# Altium PCB SolarCharger.PcbDoc
Units mm, origin at the board's own origin, x right, y up, seen from the top; angles counter-clockwise.
Board outline 50.8 x 50.8 mm, 2 copper layers (Top Layer, Bottom Layer), stack 0.471 mm thick; 40 components, 21 nets, 95 pads, 189 vias.
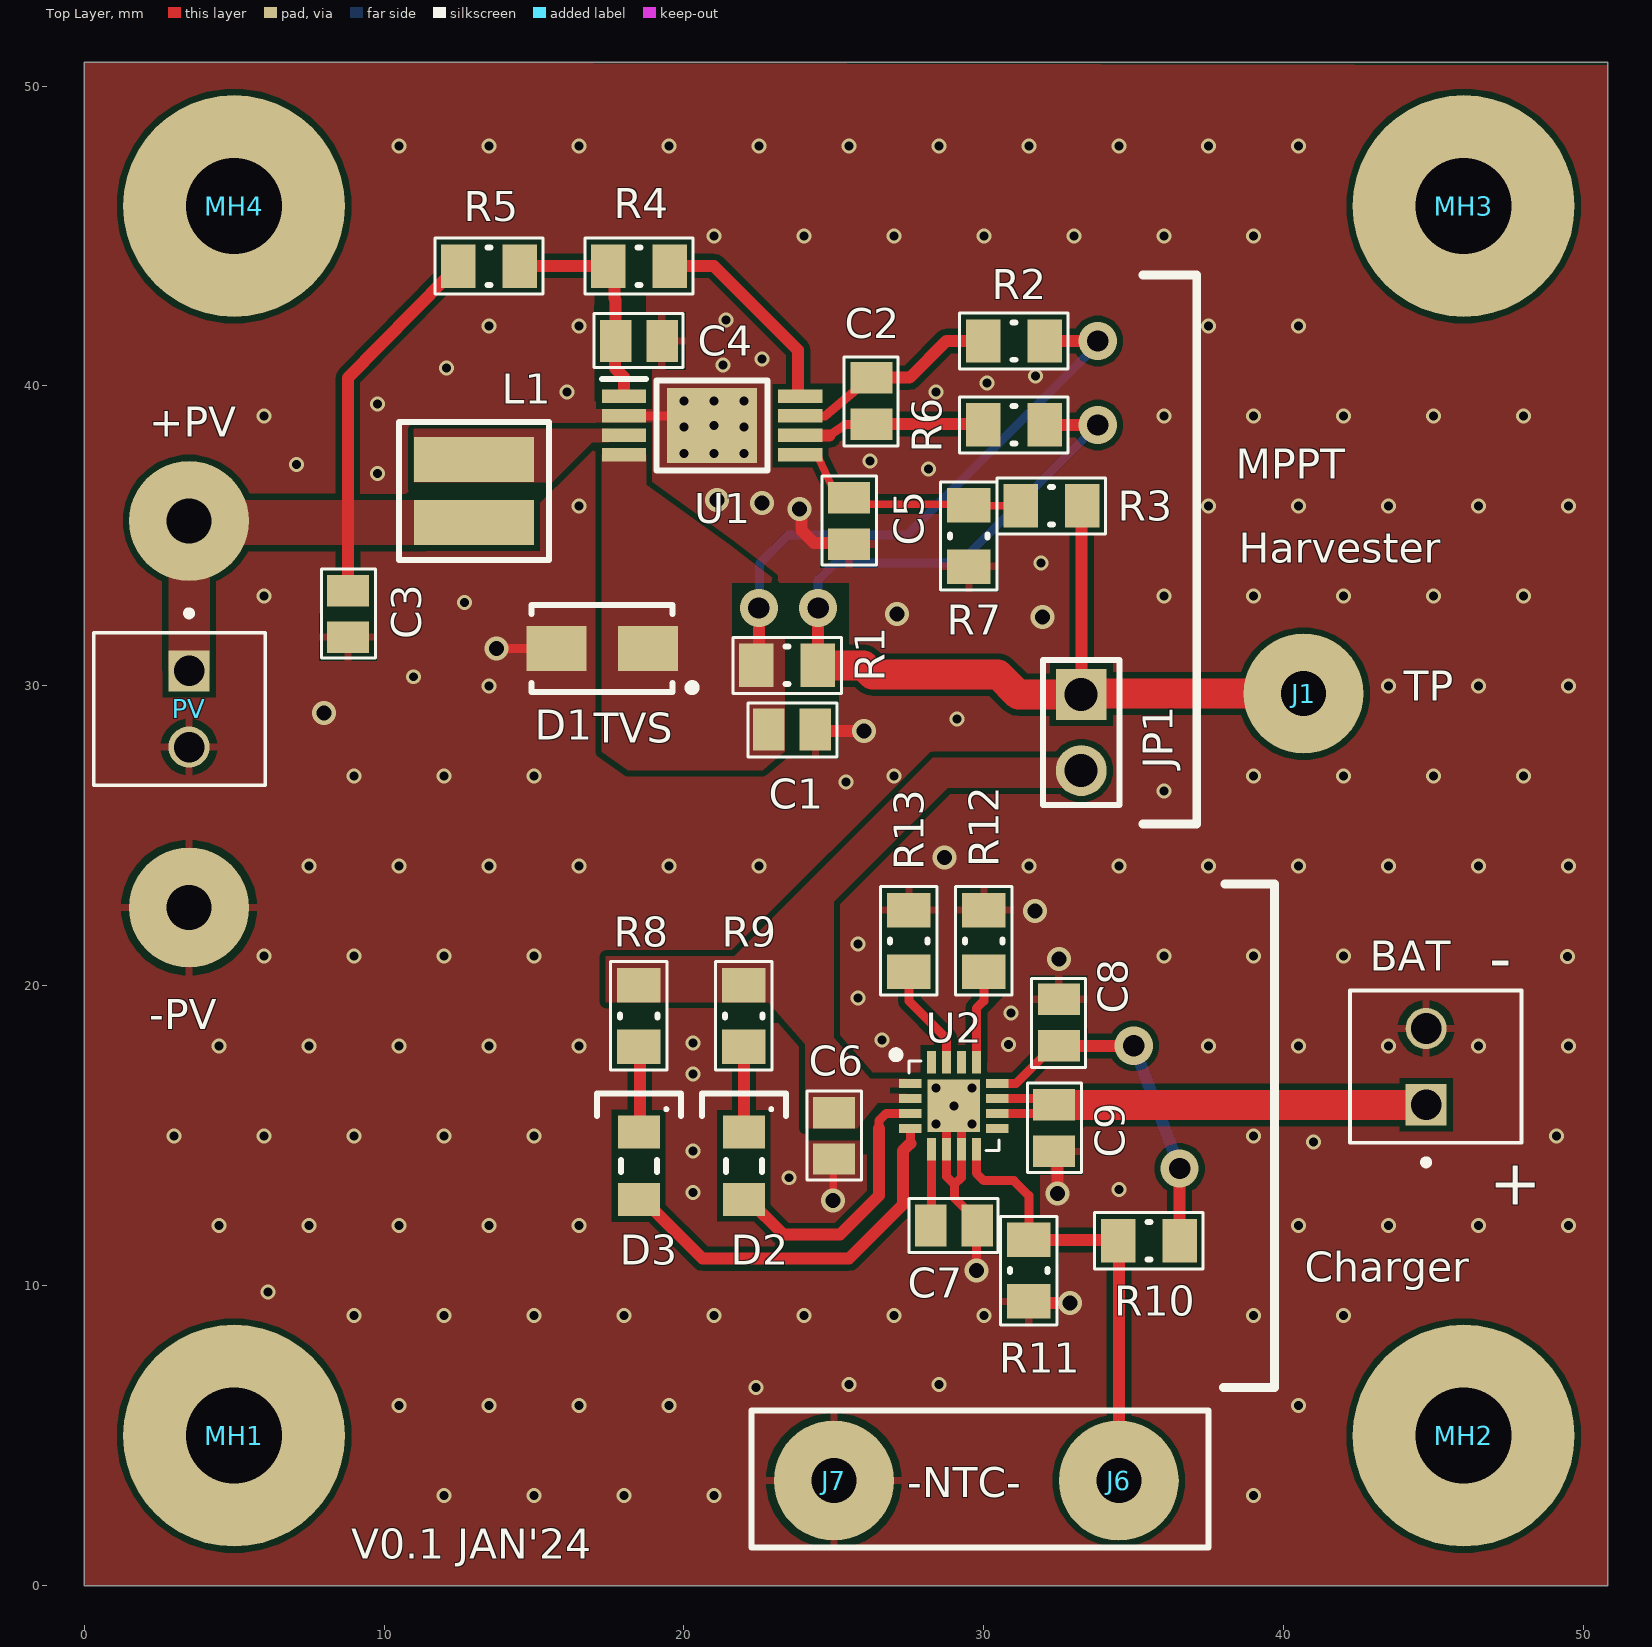
[diagram p0: Top Layer view]
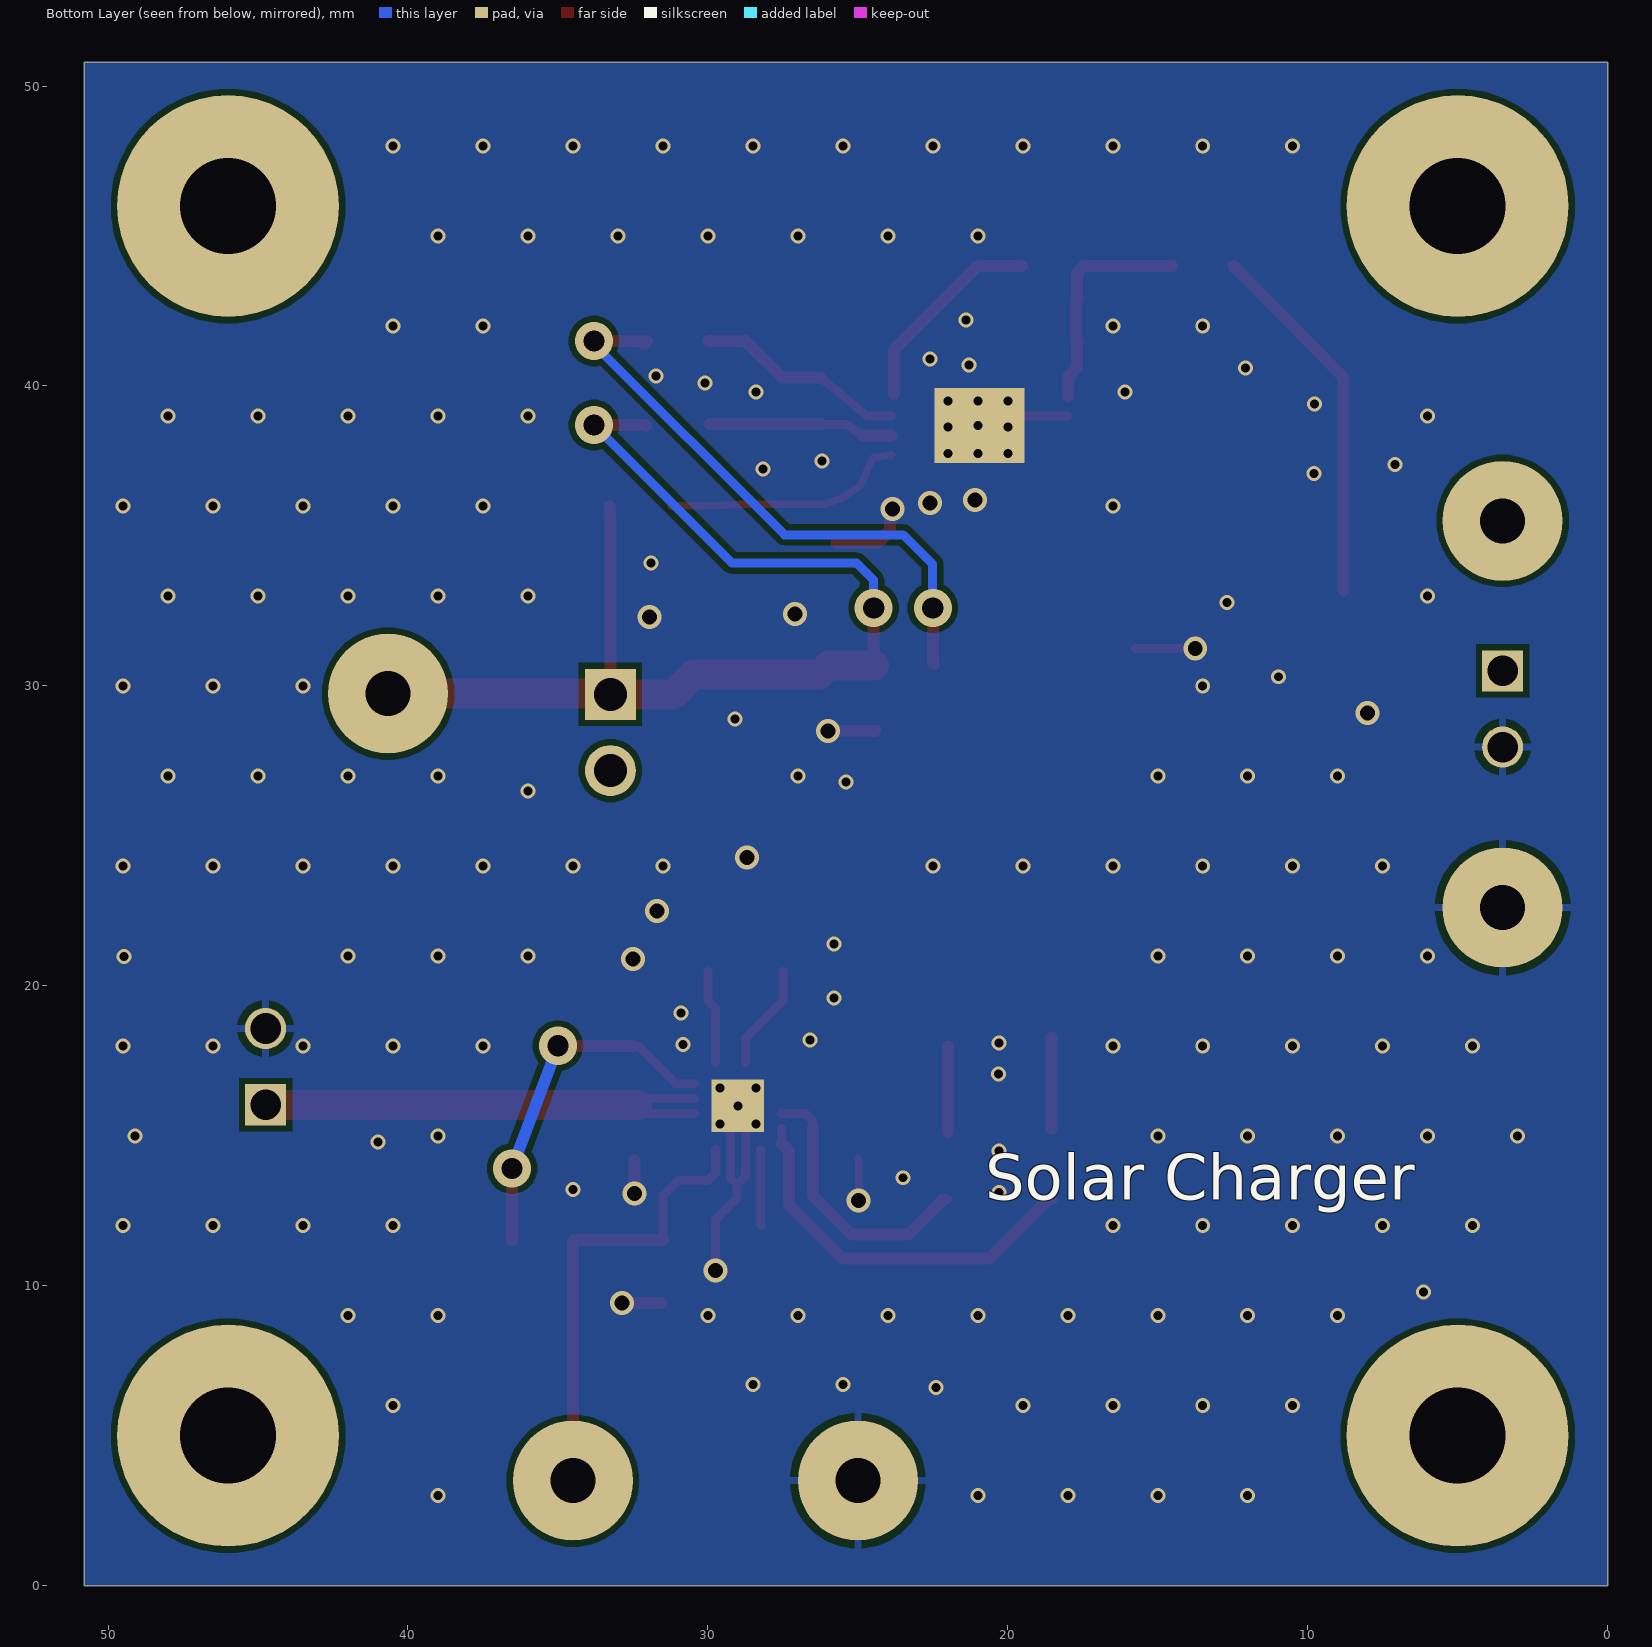
[diagram p1: Bottom Layer view, seen from below]
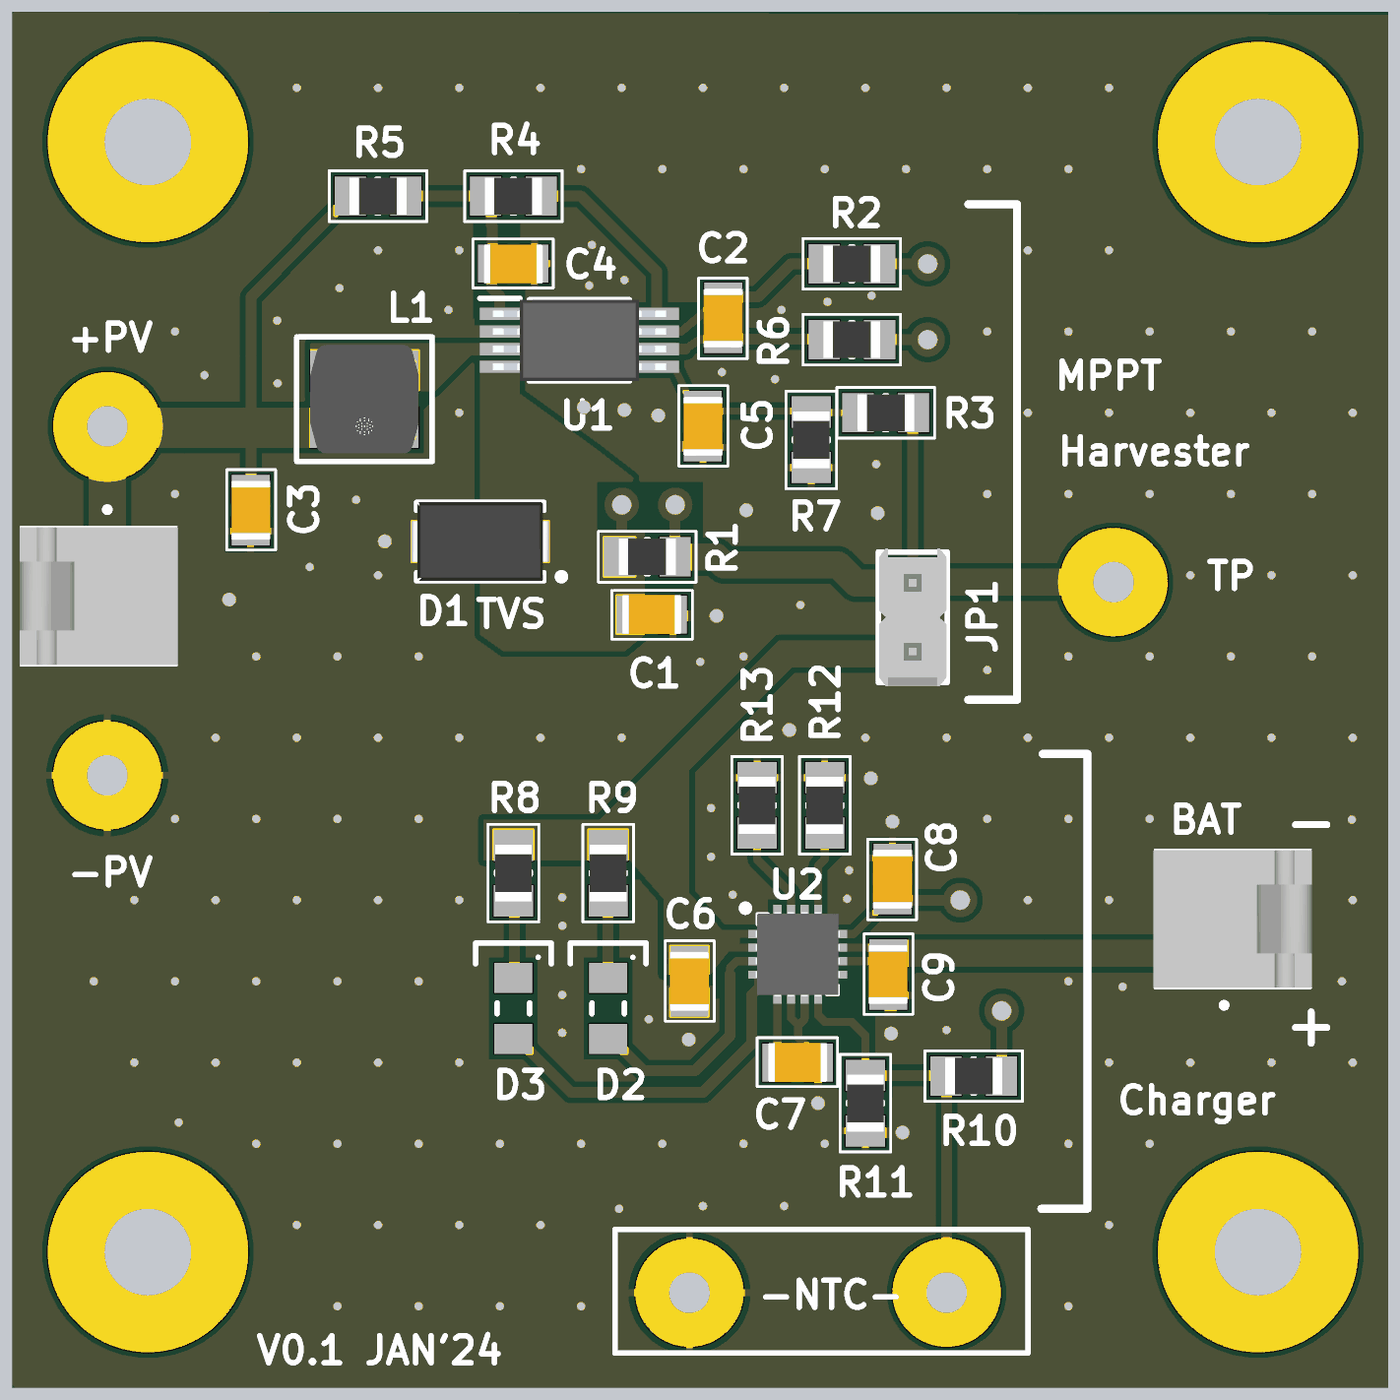
[diagram p2: 3D render of the assembled board from above, using the file's embedded part models]

## Layer stack, top to bottom
Top Solder: solder mask 0.0102, Solder Resist, Dk 3.5
Top Layer: signal copper 0.0356
Dielectric 1: dielectric 0.4, FR-4, Dk 4.8
Bottom Layer: signal copper 0.0356
Bottom Solder: solder mask 0.0102, Solder Resist, Dk 3.5

## Board outline
0,0 50.8,0 50.8,50.8 0,50.8

## Design rules (kind name [scope] priority, off if disabled: settings)
Clearance [All] p1: gap=0.2 ignorepadtopadclearanceinfootprint=FALSE
HoleSize [All] p1: absolutevalues=TRUE maxlimit=6 minlimit=0.2 maxpercent=80.000 minpercent=20.000
HoleToHoleClearance [All] p1: gap=0.5 allowstackedmicrovias=TRUE
MinimumSolderMaskSliver [All] p1: minsoldermaskwidth=0.06
PolygonConnect [All] p1: connectstyle=Relief reliefconductorwidth=0.254 reliefentries=4 polygonreliefangle="90 Angle" airgapwidth=0.254
RoutingVias [All] p1: holewidth=0.6 width=0.8 viastyle="Through Hole" minholewidth=0.3 minwidth=0.5 maxholewidth=2 maxwidth=5
SilkToSolderMaskClearance [IsPad] p1: minsilkscreentomaskgap=0.1 clearancetoexposedcopper=TRUE
SolderMaskExpansion [All] p1: expansion=0.05 istentingtop=FALSE
Width [All] p1: maxlimit=5 minlimit=0.2 preferedwidth=0.3 minimp=50.000000 maximp=50.000000 favimp=50.000000
26 further rules are at their usual default settings.

## Components (designator, comment, footprint, x,y, rotation, side; value= is the part's Value field where it differs from the comment)
+PV "Power Pad" PAD#1 3.5,35.5 r0 top
-PV "Power Pad" PAD#1 3.5,22.606 r0 top
BAT "640456-2" TE_640456-2 44.748,16.035 r270 top
C1 "10uF" YAGEO-0805-C-L 23.609,28.548 r180 top
C2 "1uF" YAGEO-0805-C-L 26.25,39.5 r90 top
C3 "47uF" YAGEO-0805-C-L 8.8,32.4 r270 top
C4 "1 nF" YAGEO-0805-C-L 18.5,41.5 r0 top
C5 "1 nF" YAGEO-0805-C-L 25.5,35.5 r270 top
C6 "47uF" YAGEO-0805-C-L 25,15 r270 top
C7 "10 nF" YAGEO-0805-C-L 29,12 r0 top
C8 "1 nF" YAGEO-0805-C-L 32.5,18.775 r90 top
C9 "4.7uF" YAGEO-0805-C-L 32.341,15.254 r270 top
D1 "TVS-MSKSEMI" MSKSEMI-TVS-L 17.273,31.242 r180 top
D2 "SMD LED" SMD-LED-L 22,14 r270 top
D3 "SMD LED" SMD-LED-L 18.5,14 r270 top
J1 "Power Pad" PAD#2 40.665,29.743 r0 top
J6 "Power Pad" PAD#2 34.5,3.5 r0 top
J7 "Power Pad" PAD#2 25,3.5 r0 top
JP1 "J2P" DIP2 33.249,29.718 r270 top
L1 "10uH" "BEAD 10UH" 13,36.5 r90 top
MH1 "Mounting Hole" "MOUNTING HOLE"#1 4.2,4 r0 top
MH2 "Mounting Hole" "MOUNTING HOLE"#2 46.75,4 r0 top
MH3 "Mounting Hole" "MOUNTING HOLE"#3 46.75,46.75 r0 top
MH4 "Mounting Hole" "MOUNTING HOLE"#4 4.2,46.8 r0 top
PV "640456-2" TE_640456-2 3.5,30.5 r90 top
R1 "0Ω" YAGEO-0805-R-L 23.444,30.681 r0 top
R2 "1KΩ" YAGEO-0805-R-L 31,41.5 r0 top
R3 "2.2MΩ" YAGEO-0805-R-L 32.25,36 r0 top
R4 "0Ω" YAGEO-0805-R-L 18.5,44 r0 top
R5 "1KΩ" YAGEO-0805-R-L 13.5,44 r180 top
R6 "1KΩ" YAGEO-0805-R-L 31,38.7 r0 top
R7 "820KΩ" YAGEO-0805-R-L 29.5,35 r90 top
R8 "1KΩ" YAGEO-0805-R-L 18.5,19 r90 top
R9 "1KΩ" YAGEO-0805-R-L 22,19 r90 top
R10 "1KΩ" YAGEO-0805-R-L 35.5,11.5 r0 top
R11 "470Ω" YAGEO-0805-R-L 31.5,10.5 r90 top
R12 "3.3KΩ" YAGEO-0805-R-L 30,21.5 r270 top
R13 "24KΩ" YAGEO-0805-R-L 27.5,21.5 r270 top
U1 "SPV1040T" SOP65P640X120-8N 20.938,38.675 r0 top
U2 "L6924D" QFN50P300X300X100-17L-D 29,16 r0 top

## Footprints (in the part's own frame and the unit in brackets; to place one, negate y for a bottom-side part, rotate by r counter-clockwise, add the part's x,y. Pads: shape width x height; smd on the part's side, far side on the other; paste and mask are expansions set on the pad)
"BEAD 10UH" [mm]
  rect 1.5x4 smd: 1(-1.05,0) 2(1.05,0)
  silkscreen extent -2.3,-2.5 2.3,2.5, body extent -2,-2 2,2, height 1.21
DIP2 [mm]
  rect 1.7x1.7 hole 1.1: 1(0,0)
  round 1.7 hole 1.1: 2(2.54,0)
  silkscreen extent -1.14,-1.27 3.68,1.27, body extent -1.27,-1.24 3.81,1.24, height 8.39
"MOUNTING HOLE"#1 [mm]
  round 7.4 hole 3.2: 1(0.8,1)
"MOUNTING HOLE"#2 [mm]
  round 7.4 hole 3.2: 1(-0.75,1)
"MOUNTING HOLE"#3 [mm]
  round 7.4 hole 3.2: 1(-0.75,-0.75)
"MOUNTING HOLE"#4 [mm]
  round 7.4 hole 3.2: 1(0.8,-0.8)
MSKSEMI-TVS-L [mm] "MSKSEMI TVS Large footprint"
  rect 2x1.5 smd: 1(-1.525,0) 2(1.525,0)
  silkscreen extent -3.13,-1.45 2.35,1.45, body extent -2.55,-1.45 2.55,1.45, height 2.41
PAD#1 [mm]
  round 4 hole 1.5: ""(0,0)
PAD#2 [mm]
  round 4 hole 1.5: 1(0,0)
QFN50P300X300X100-17L-D [mm]
  rect 0.75x0.3 smd mask+0: 1(-1.45,0.75) 2(-1.45,0.25) 3(-1.45,-0.25) 4(-1.45,-0.75) 9(1.45,-0.75) 10(1.45,-0.25) 11(1.45,0.25) 12(1.45,0.75)
  rect 0.3x0.75 smd mask+0: 5(-0.75,-1.45) 6(-0.25,-1.45) 7(0.25,-1.45) 8(0.75,-1.45) 13(0.75,1.45) 14(0.25,1.45) 15(-0.25,1.45) 16(-0.75,1.45)
  rect 1.75x1.75 smd: 17(0,0)
  rect 1.75x1.75 smd far side: 17(0,0)
  silkscreen extent -2.05,-1.5 1.5,1.83, body extent -1.55,-1.55 1.55,1.55, height 1
SMD-LED-L [mm] "SMD LED Low Density"
  rect 1.1x1.4 smd: 1(-1.125,0) 2(1.125,0)
  silkscreen extent -2.41,-1.4 0.2,1.4, body extent -1.1,-0.63 1.1,0.63, height 0.9
SOP65P640X120-8N [mm]
  rect 1.475x0.45 smd mask+0: 1(-2.938,0.975) 2(-2.938,0.325) 3(-2.938,-0.325) 4(-2.938,-0.975) 5(2.938,-0.975) 6(2.938,-0.325) 7(2.938,0.325) 8(2.938,0.975)
  rect 3x2.5 smd mask+0: 9(0,0)
  rect 3x2.5 smd far side mask+0: 9(0,0)
  silkscreen extent -3.67,-1.5 1.85,1.55, body extent -3.2,-1.5 3.2,1.5, height 1.2
TE_640456-2 [mm]
  rect 1.37x1.37 hole 1.02: 1(0,0)
  round 1.37 hole 1.02: 2(-2.54,0)
  silkscreen extent -3.81,-2.54 2.02,3.18, body extent -3.81,-2.6 1.27,3.24, height 9.41
YAGEO-0805-C-L [mm] "Yageo Large Footprint"
  rect 1.05x1.4 smd: 1(-0.775,0) 2(0.775,0)
  silkscreen extent -1.5,-0.89 1.47,0.91, body extent -1.1,-0.72 1.1,0.72, height 1.45
YAGEO-0805-R-L [mm] "Yageo Resistor Large Footprint"
  rect 1.15x1.45 smd: 1(-1.025,0) 2(1.025,0)
  silkscreen extent -1.8,-0.94 1.8,0.94, body extent -1.05,-0.67 1.05,0.67, height 0.6

## Part data
+PV -PV J1 J6 J7: library part PAD, "Power pad 4mmx1.5mm"
BAT PV: "1x2P 1 2.54mm 2 Copper Alloy Plugin,P=2.54mm Wire To Board / Wire To Wire Connector", Manufacturer=TE, Supplier Part Number=C86502, ComponentLink1Description="TE Connector", ComponentLink1URL=https://datasheet.lcsc.com/lcsc/2304140030_TE-Connectivity-640456-2_C86502.pdf, Manufacturer Part Number=640456-2, Price=0.0711, Supplier=LCSC
C1: library part CC0805KKX5R7BB106, "10 uF, 16 V, ± 10%, X5R, 0805", Manufacturer=Yageo, Supplier Part Number=C89827, ComponentLink5Description="Yageo Capacitors", ComponentLink5URL=http://www.yageo.com/documents/recent/UPY-GPHC_X5R_4V-to-50V_12.pdf?src-supplier=Avnet, Form=0805, Manufacturer Part Number=CC0805KKX5R7BB106, Price=0.0419, Supplier=LCSC
C2: library part CC0805KKX7R6BB105, "1 uF, 10 V, ± 10%, X7R, 0805", Manufacturer=Yageo, Supplier Part Number=C519973, ComponentLink10Description="Yageo Capacitors", ComponentLink10URL=https://datasheet.lcsc.com/lcsc/2007101233_YAGEO-CC0805KKX7R6BB105_C519973.pdf, Form=0805, Manufacturer Part Number=CC0805KKX7R6BB105, Price=0.0116, Supplier=LSCS
C3 C6: library part CL21A476MQYNNNE, "47 uF, 6.3 V, ± 20%, X5R, 0805", Manufacturer=Samsung, Supplier Part Number=C16780, ComponentLink1Description="Samsung SMD Capacitor", ComponentLink1URL=https://datasheet.lcsc.com/lcsc/2304140030_Samsung-Electro-Mechanics-CL21A476MQYNNNE_C16780.pdf, Form=0805, Manufacturer Part Number=CL21A476MQYNNNE, Price=0.0273, Supplier=LCSC
C4 C5 C8: library part CC0805KRX7R9BB102, "1 nF,  50V, 10%, X7R, 0805", Manufacturer=Yageo, Supplier Part Number=C94121, ComponentLink6Description="Yageo Capacitors", ComponentLink6URL=https://datasheet.lcsc.com/lcsc/1810311439_YAGEO-CC0805KRX7R9BB102_C94121.pdf, Form=0805, Manufacturer Part Number=CC0805KRX7R9BB102, Price=0.0047, Supplier=LCSC
C7: library part CC0805KRX7R9BB103, "10 nF, 50 V, ± 10%, X7R, 0805", Manufacturer=Yageo, Supplier Part Number=C83170, ComponentLink5Description="Yageo Capacitors", ComponentLink5URL=https://datasheet.lcsc.com/lcsc/2304140030_YAGEO-CC0805KRX7R9BB103_C83170.pdf, Form=0805, Manufacturer Part Number=CC0805KRX7R9BB103, Price=0.0050, Supplier=LCSC
C9: library part CC0805KKX5R8BB475, "4.7 uF, 50 V, ± 10%, X5R, 0805", Manufacturer=Yageo, Supplier Part Number=C132173, ComponentLink1Description="Yageo Capacitors", ComponentLink1URL=https://datasheet.lcsc.com/lcsc/2304140030_YAGEO-CC0805KKX5R8BB475_C132173.pdf, Form=0805, Manufacturer Part Number=CC0805KKX5R8BB475, Price=0.0335, Supplier=LCSC
D1: library part SMAJ5.0A, "TVS 9.2V 6.4V 5V SMA", Manufacturer=MSKSEMI, Supplier Part Number=C5189780, ComponentLink1Description="MSKSEMI SMAJXXXA", ComponentLink1URL=https://datasheet.lcsc.com/lcsc/2309270936_MSKSEMI-SMAJ5-0A_C5189780.pdf, Manufacturer Part Number=SMAJ5.0A, Price=0.0220, Supplier=LCSC
D2 D3: "516nm~525nm -30℃~+85℃ Positive post Emerald 120° 80mW 0805", Manufacturer=XINGLIGHT, Manufacturer Part Number=XL-2012UGC, Supplier Part Number=C965815, ComponentLink1Description="XINGLIGHT SMD LED", ComponentLink1URL=https://datasheet.lcsc.com/lcsc/2211030000_XINGLIGHT-XL-2012UGC_C965815.pdf, Form=0805, Price=0.0049, Supplier=LCSC
JP1: library part PH-00218, "2.5mm 3A  2P Straight Square Pins 6mm -40℃~+105℃ 3mm 2.54mm Plugin Black 1x2P Plugin,P=2.54mm Pin Header", Manufacturer=Liasheng, Supplier Part Number=C2685144, ComponentLink1Description=https://datasheet.lcsc.com/lcsc/2106070303_Liansheng-PH-00218_C2685144.pdf, ComponentLink1URL=https://datasheet.lcsc.com/lcsc/2106070303_Liansheng-PH-00218_C2685144.pdf, Manufacturer Part Number=PH-00218, Price=0.0109, Supplier=LCSC
L1: library part VLS5045EX-100M, "10 uH Power Inductor 20% 100KHz Ferrite 2.5A 0.061Ohm", Manufacturer=TDK, Supplier Part Number=C404485, ComponentLink1Description="TDK Power Inductor", ComponentLink1URL=https://datasheet.lcsc.com/lcsc/2304140030_TDK-VLS5045EX-100M_C404485.pdf, Manufacturer Part Number=VLS5045EX-100M, Price=0.1245, Supplier=LCSC
MH1 MH2 MH3 MH4: "Mounting hole 7.4mm x 3.2mm"
R1 R4: library part AC0805FR-070RL, "0 Ohm, 1%, 0.125W, 0805", Manufacturer=Yageo, Supplier Part Number=C174076, ComponentLink1Description="Yageo Resistros", ComponentLink1URL=https://datasheet.lcsc.com/lcsc/2304140030_YAGEO-AC0805FR-070RL_C174076.pdf, Form=0805, Manufacturer Part Number=AC0805FR-070RL, Price=0.0039, Supplier=LCSC
R2 R5 R6 R8 R9 R10: library part RC0805FR-071KL, "1 kOhm, ± 1%, 125 mW, 0805", Manufacturer=Yageo, Supplier Part Number=C95781, ComponentLink1Description="Yageo Resistors", ComponentLink1URL=https://www.yageo.com/upload/media/product/productsearch/datasheet/rchip/PYu-RC_Group_51_RoHS_L_12.pdf, Form=0805, Manufacturer Part Number=RC0805FR-071KL, Price=0.0022, Supplier=LCSC
R3: library part RC0805FR-072M2L, "2.2 MOhm, ± 1%, 125 mW, 0805", Manufacturer=Yageo, Supplier Part Number=C137552, ComponentLink1Description="Yageo Resistors", ComponentLink1URL=https://datasheet.lcsc.com/lcsc/2304140030_YAGEO-RC0805FR-072M2L_C137552.pdf, Form=0805, Manufacturer Part Number=RC0805FR-072M2L, Price=0.0022, Supplier=LCSC
R7: library part RC0805FR-07820KL, "820 kOhm, ± 1%, 125 mW, 0805", Manufacturer=Yageo, Supplier Part Number=C141700, ComponentLink1Description="Yageo Resistors", ComponentLink1URL=https://datasheet.lcsc.com/lcsc/2304140030_YAGEO-RC0805FR-07820KL_C141700.pdf, Form=0805, Manufacturer Part Number=RC0805FR-07820KL, Price=0.0021, Supplier=LCSC
R11: library part RC0805FR-07470RL, "470 Ohm, ± 1%, 125 mW, 0805", Manufacturer=Yageo, Supplier Part Number=C114564, ComponentLink1Description="Yageo Resistors", ComponentLink1URL=https://datasheet.lcsc.com/lcsc/2304140030_YAGEO-RC0805FR-07470RL_C114564.pdf, Form=0805, Manufacturer Part Number=RC0805FR-07470RL, Price=0.0020, Supplier=LCSC
R12: library part RC0805FR-073K3L, "3.3 kOhm, ± 1%, 125 mW, 0805", Manufacturer=Yageo, Supplier Part Number=C114531, ComponentLink1Description="Yageo Resistors", ComponentLink1URL=https://datasheet.lcsc.com/lcsc/2304140030_YAGEO-RC0805FR-073K3L_C114531.pdf, Form=0805, Manufacturer Part Number=RC0805FR-073K3L, Price=0.0023, Supplier=LCSC
R13: library part RC0805FR-0724KL, "24 kOhm, ± 1%, 125 mW, 0805", Manufacturer=Yageo, Supplier Part Number=C137562, ComponentLink1Description="Yageo Resistors", ComponentLink1URL=https://datasheet.lcsc.com/lcsc/2304140030_YAGEO-RC0805FR-0724KL_C137562.pdf, Form=0805, Manufacturer Part Number=RC0805FR-0724KL, Price=0.0020, Supplier=LCSC
U1: "IC BATTERY CHARGER SOLAR 8TSSOP", Manufacturer=STMicroelectronics, Supplier Part Number=497-11417-ND, Category="Battery Management", ComponentLink1Description=https://datasheet.ciiva.com/15114/getdatasheetpartid-464486-15114755.pdf?src-supplier=Verical, ComponentLink1URL=https://datasheet.ciiva.com/15114/getdatasheetpartid-464486-15114755.pdf?src-supplier=Verical, ComponentLink2Description=https://datasheet.ciiva.com/1932/cd00287506-1932586.pdf?src-supplier=Digi-Key, ComponentLink2URL=https://datasheet.ciiva.com/1932/cd00287506-1932586.pdf?src-supplier=Digi-Key, ComponentLink3Description=https://datasheet.ciiva.com/4878/cd00287506-4878671.pdf?src-supplier=Mouser, ComponentLink3URL=https://datasheet.ciiva.com/4878/cd00287506-4878671.pdf?src-supplier=Mouser, Manufacturer Part Number=SPV1040T, Pricing="1=4.46, 10=4.002, 25=3.784, 100=3.2793, 250=3.11112, 500=2.7916, 1000=2.35437, 2500=2.23665 (USD)", RoHS=Yes, Stock=1452, Supplier=Digi-Key
U2: "Battery Charger Li-Ion/Li-Pol 30mA 4.1V 16-Pin VFQFPN EP", Manufacturer=STMicroelectronics, Max Charge Current=1A, Max Operating Temperature=125°C, Max Supply Voltage=12V, Min Operating Temperature=-40°C, Min Supply Voltage=2.5V, Output Current=30mA, Output Voltage=4.1V, Package Quantity=100, Supplier Part Number=L6924D-ND, Category="Battery Management", ComponentLink1Description=https://datasheet.ciiva.com/15114/getdatasheetpartid-131731-15114450.pdf?src-supplier=Verical, ComponentLink1URL=https://datasheet.ciiva.com/15114/getdatasheetpartid-131731-15114450.pdf?src-supplier=Verical, ComponentLink2Description=https://datasheet.ciiva.com/14632/0900766b80dafbb8-14632423.pdf?src-supplier=Allied+Electronics, ComponentLink2URL=https://datasheet.ciiva.com/14632/0900766b80dafbb8-14632423.pdf?src-supplier=Allied+Electronics, ComponentLink3Description=https://datasheet.ciiva.com/1137/cd00079821-1137146.pdf?src-supplier=Element14, ComponentLink3URL=https://datasheet.ciiva.com/1137/cd00079821-1137146.pdf?src-supplier=Element14, ComponentLink4Description=https://datasheet.ciiva.com/3213/cd00079821-3213355.pdf?src-supplier=Avnet, ComponentLink4URL=https://datasheet.ciiva.com/3213/cd00079821-3213355.pdf?src-supplier=Avnet, ComponentLink5Description=https://datasheet.ciiva.com/1934/cd00079821-1934461.pdf?src-supplier=Digi-Key, ComponentLink5URL=https://datasheet.ciiva.com/1934/cd00079821-1934461.pdf?src-supplier=Digi-Key, Height=0.88mm, Length=3mm, Manufacturer Part Number=L6924D, Mounting Technology="Surface Mount", Number of Cells=1, Packaging=Rail/Tube, Pins=16, Pricing="2000=0.9585 (USD)", Radiation Hardening=No, Reach SVHC Compliant=No, RoHS=Yes, RoHS Compliant=Yes, Series=-, Supplier=Digi-Key, Width=3mm

## Via types
v1: diameter 0.5, hole 0.3, Top Layer to Bottom Layer, tented both sides, 154 vias
v2: diameter 0.8, hole 0.5, Top Layer to Bottom Layer, tented both sides, 15 vias
v3: diameter 0.5, hole 0.3, Top Layer to Bottom Layer, 14 vias
v4: diameter 1.27, hole 0.711, Top Layer to Bottom Layer, tented both sides, 6 vias

## Nets (pads, with @x,y where several pads share a name; then routed paths per layer and width w, separated by ;. In a path a pad name is that pad's centre, name@x,y a point inside that pad or via, vN(x,y) a via of type N, cw(c..) or ccw(c..) an arc to the next point about the centre after c; other vN are vias at no path point)
+BAT: BAT.1 C9.1 U2.10 U2.11 | length 16.5
  Top Layer w0.254: C9.1@32.062,15.75 C9.1 C9.1@32.12,16.25 ; BAT.1@44.717,15.71 BAT.1@44.755,15.748 ; BAT.1@44.742,16.029 BAT.1
  Top Layer w0.3: U2.10 C9.1@32.062,15.75 ; U2.11 C9.1@32.12,16.25
  Top Layer w1: C9.1 BAT.1@44.742,16.029
+PV: +PV. C3.1 L1.1 PV.1 R5.2 | length 12.3
  Top Layer w0.4: C3.1@8.802,33.175 8.802,40.269 12.1,43.619 R5.2
CH_VIN: C6.1 JP1.2 R8.2 R9.2 U2.1 U2.2
GND: -PV. BAT.2 C1.1 C3.2 C4.2 C5.2 C6.2 C7.2 C8.2 C9.2 D1.2 J7.1 PV.2 R7.1 R11.1 R12.1 R13.1 U1.2 U1.9 U2.6 U2.7 U2.17 | length 22.4
  Top Layer w0.254: C1.1@24.384,28.448 C1.1@24.434,28.498 ; v2(24.973,12.848) 24.973,14.198 C6.2 ; R11.1 R11.1@31.558,9.417 ; C9.2@32.449,14.174 C9.2@32.5,14.225
  Top Layer w0.3: v2(13.75,31.25) 15.74,31.25 D1.2 ; U1.2 20.675,39 v3(21,38.675) ; C1.1 C1.1@24.432,28.5 ; v2(29.75,10.5) 29.75,12.2 29.022,12.928 29.022,13.376 ; 29.022,13.376 28.75,13.648 U2.6 28.75,15.75 v3(29,16) 29.25,15.75 U2.7 29.25,13.605 29.022,13.376
  Top Layer w0.4: v2(23.851,35.9) 23.928,35.823 23.928,35.18 24.346,34.763 C5.2@25.712,34.763 ; C1.1@24.432,28.5 v2(26,28.5) ; R11.1@31.558,9.417 v2(32.872,9.417) ; v2(32.449,13.07) C9.2@32.449,14.174
  other v1: 12,3 15,3 18,3 21,3 39,3 10.5,6 13.5,6 16.5,6 19.5,6 40.5,6 22.4,6.6 25.5,6.7 28.5,6.7 9,9 12,9 15,9 18,9 21,9 24,9 27,9 30,9 39,9 42,9 6.137,9.786 4.5,12 7.5,12 10.5,12 13.5,12 16.5,12 40.5,12 43.5,12 46.5,12 49.5,12 20.3,13.1 34.5,13.2 23.5,13.6 20.3,14.5 41,14.8 3,15 6,15 9,15 12,15 15,15 39,15 49.1,15 20.308,17.056 4.5,18 7.5,18 10.5,18 13.5,18 16.5,18 37.5,18 40.5,18 43.5,18 46.5,18 49.5,18 30.826,18.049 20.3,18.1 26.6,18.2 30.9,19.1 25.8,19.6 49.469,20.971 6,21 9,21 12,21 15,21 36,21 39,21 42,21 25.8,21.4 7.5,24 10.5,24 13.5,24 16.5,24 19.5,24 22.5,24 31.5,24 34.5,24 37.5,24 40.5,24 43.5,24 46.5,24 49.5,24 36,26.5 25.4,26.8 9,27 12,27 15,27 27,27 39,27 42,27 45,27 48,27 29.1,28.9 13.5,30 43.5,30 46.5,30 49.5,30 10.976,30.305 12.69,32.789 6,33 36,33 39,33 42,33 45,33 48,33 31.9,34.1 16.5,36 37.5,36 40.5,36 43.5,36 46.5,36 49.5,36 9.79,37.089 28.16,37.24 7.09,37.389 26.2,37.5 6,39 36,39 39,39 42,39 45,39 48,39 9.776,39.405 16.1,39.8 28.4,39.8 30.1,40.1 31.726,40.325 12.076,40.605 21.3,40.7 22.6,40.9 13.5,42 16.5,42 37.5,42 40.5,42 21.4,42.2 21,45 24,45 27,45 30,45 33,45 36,45 39,45 10.5,48 13.5,48 16.5,48 19.5,48 22.5,48 25.5,48 28.5,48 31.5,48 34.5,48 37.5,48 40.5,48
  other v2: 32.5,20.9 31.7,22.5 28.691,24.282 8,29.1 31.952,32.293 27.1,32.4 22.6,36.1 21.1,36.2
  other v3: 28.4,15.4 29.6,15.4 28.4,16.6 29.6,16.6 20,37.75 21,37.75 22,37.75 20,38.625 22,38.625 20,39.5 21,39.5 22,39.5
ictrl+: C2.2 R2.1 U1.7 | length 7.1
  Top Layer w0.3: U1.7 24.694,39.002 ; 24.703,39.002 25.765,39.9 C2.2
  Top Layer w0.4: C2.2 27.525,40.275 28.75,41.5 R2.1
ictrl-: C2.1 R6.1 U1.6 | length 6.2
  Top Layer w0.3: 24.853,38.35 25.379,38.709 C2.1@26.226,38.709
  Top Layer w0.4: U1.6 24.85,38.35 ; C2.1 R6.1@29.95,38.725
Lx: L1.2 U1.3
Mpp: C4.1 R4.1 R5.1 U1.1 | length 7.5
  Top Layer w0.4: R5.1 R4.1 ; R4.1@17.5,43.975 17.691,43.784 17.691,42.909 17.725,42.875 C4.1 17.7,41.475 17.7,40.6 18,40.3 U1.1
NetD2_1: D2.1 R9.1 | length 2.9
  Top Layer w0.4: D2.1 R9.1
NetD3_1: D3.1 R8.1 | length 3
  Top Layer w0.4: D3.1@18.542,15.24 R8.1@18.542,18.27
NetJ1_1: J1.1 JP1.1 R1.2 R3.2 R6.2 | length 38.9
  Top Layer w0.254: R6.2 R6.2@32.059,38.666
  Top Layer w0.4: R1.2@24.472,30.683 v4@24.472,32.545 ; R6.2@32.059,38.666 32.093,38.7 v4(33.8,38.7) ; JP1.1 33.251,30.368 33.251,35.475 R3.2
  Top Layer w1: R1.2@24.472,30.683 R1.2 25.981,30.681 26.281,30.381 30.481,30.381 31.151,29.71 32.899,29.71 JP1.1 33.599,29.743 J1.1 ; v4@24.472,32.545 v4@24.475,32.548
  Bottom Layer w0.3: v4(24.475,32.6) 24.475,33.523 25.051,34.1 29.2,34.1 v4(33.8,38.7)
NetR12_2: R12.2 U2.13 | length 3.1
  Top Layer w0.3: U2.13 29.75,19.25 30,19.5 R12.2
NetR13_2: R13.2 U2.15 | length 3.5
  Top Layer w0.3: R13.2 27.5,19.5 28.75,18.25 U2.15
Shunt: R4.2 U1.8 | length 6.9
  Top Layer w0.4: R4.2 21,44 23.8,41.2 U1.8@23.8,39.726
ST1: D3.2 U2.4 | length 13
  Top Layer w0.3: D3.2 D3.2@18.65,12.875 ; 27.55,14.75 U2.4
  Top Layer w0.4: D3.2@18.65,12.875 20.625,10.9 25.5,10.9 27.3,12.7 27.3,14.5 27.55,14.75
ST2: D2.2 U2.3 | length 9.2
  Top Layer w0.3: D2.2 D2.2@22.15,12.875 ; 26.5,15.25 26.5,15.5 26.75,15.75 U2.3
  Top Layer w0.4: D2.2@22.15,12.875 23.325,11.7 25.2,11.7 26.5,13 26.5,15.25
TH: J6.1 R10.1 R11.2 U2.8 | length 15.3
  Top Layer w0.3: U2.8 29.75,13.75 30,13.5 31,13.5 31.5,13 R11.2 ; R10.1@34.45,11.525 R10.1 R10.1@34.5,11.475
  Top Layer w0.4: R11.2 R10.1@34.45,11.525 ; J6.1 R10.1@34.5,11.475
Tprg: C7.1 U2.5 | length 2.6
  Top Layer w0.3: C7.1 28.25,12.025 U2.5
vctrl: C5.1 R3.1 R7.2 U1.5 | length 8.1
  Top Layer w0.254: U1.5 24.487,37.602 24.927,36.673 C5.1 26.073,36.062 28.902,36.062 R7.2 30.098,36.006 30.777,36.006 R3.1
vout: C1.2 D1.1 R1.1 R2.2 U1.4 | length 19.7
  Top Layer w0.3: R1.1 R1.1@22.5,30.761
  Top Layer w0.4: R1.1@22.5,30.761 v4(22.5,32.6) ; R2.2@32.125,41.4 R2.2 v4(33.8,41.5)
  Bottom Layer w0.3: v4@22.518,32.618 22.518,34.068 23.489,35.039 27.439,35.039 33.8,41.4 v4(33.8,41.5)
"vref +1.8v": C8.1 R10.2 U2.12 | length 11.8
  Top Layer w0.3: U2.12 31.075,16.75 32.325,18 C8.1
  Top Layer w0.4: C8.1 v4(35,18) ; R10.2 36.53,12.025 v4(36.53,13.909)
  Bottom Layer w0.4: v4(35,18) v4(36.53,13.909)
pads on no net: MH1.1 MH2.1 MH3.1 MH4.1 U2.9 U2.14 U2.16

## Polygon pours and split planes (outlines as drawn)
GND on Top Layer "123S" (solid, pour order 51): 0,50.8 0,0 0.002,0 13.53,0 25.491,0 49.848,0 50.8,0 50.8,0.003 50.8,0.223 50.8,50.7
CH_VIN on Top Layer "Top Layer-CH_VIN" (solid, pour order 37): 28.8,26.6 33.249,26.6 33.249,27.6 28.3,27.6 21.678,20.978 17.4,20.978 17.4,19.458 22.805,19.458 24.039,18.047 24.039,15.252 25.778,15.252 26.456,16.099 27.432,16.099 27.432,16.397 26.867,16.397 26.867,16.613 27.432,16.613 27.432,16.899 26.208,16.899 25,18.268 25,22.8
vout on Top Layer "VOUT_L01_P017" (solid, pour order 17): 18.737,37.7 17.263,37.7 17.263,27.798 18.127,27.189 22.623,27.189 23.232,27.697 23.359,27.798 23.359,33.279 21.544,34.682 18.737,36.71
+PV on Top Layer "+PV_L01_P045" (solid, pour order 45): 11.474,34.701 5.014,34.701 5.014,35.986 5,36 5.197,36.197 11.471,36.197
+PV on Top Layer "+PV_L01_P046" (solid, pour order 46): 2.815,30.5 4.184,30.5 4.184,35.5 2.815,35.5
Lx on Top Layer "LX_L01_P047" (solid, pour order 47): 17.5,38.573 17.5,38.127 16.948,38.127 15.619,36.798 11,36.798 11,38.573
GND on Bottom Layer "GND_L02_P035" (solid, pour order 35): 0,0 17.51,-0.009 50.8,0.016 50.8,50.8 0,50.8

## Other copper
Top Layer:
  pour cut-out: 33.454,18.771 33.454,18.747 33.4,18.693 33.4,18.477 33.458,18.419
  pour cut-out: 24.039,15.048 24.04,15.048 24.04,14.838 26.014,14.838 26.069,14.894 26.069,15.127
  pour cut-out: 21.601,31.59 25.505,31.579 25.505,33.441 21.589,33.441
  pour cut-out: 25.505,31.579 25.506,31.346 25.208,31.347 25.217,31.594
  pour cut-out: 31.857,13 31.857,13.713 31.35,13.713 31.331,13.731 31.289,13.689 31.289,13.606
  pour cut-out: 21.075,18.75 21.075,19.25 22.716,19.25 23.216,18.75
  pour cut-out: 17.575,19.25 17.575,18.75 19.425,18.75 19.425,19.254
  pour cut-out: 18.25,44.925 18.75,44.925 18.75,43.075 18.75,42.451 18.252,42.451 18.246,42.456
  pour cut-out: 26.521,21.696 26.526,21.691 26.526,19.701 26.605,19.701 26.674,19.77 26.674,21.151 26.575,21.25
  pour cut-out: 28.478,21.695 28.478,19.696 28.338,19.696 28.305,19.73 28.305,21.522
  pour cut-out: 30.979,21.696 30.979,19.701 30.983,19.697 30.908,19.697 30.908,20.692 30.9,20.7 30.906,20.706 30.906,21.671 30.927,21.692
  pour cut-out: 29.022,22.327 29.022,19.703 29.025,19.7 29.075,19.7 29.075,21.25 29.077,21.252 29.077,22.324
  pour cut-out: 28.996,11.046 28.942,11.1 27.5,11.1 27.5,11.04
  pour cut-out: 30.107,19.102 30.708,19.703 30.708,19.707 30.322,19.707 30.301,19.727
  pour cut-out: 26.454,35.504 26.4,35.55 26.4,35.867 26.457,35.865
  pour cut-out: 10.8,36.6 10.804,36.236 15.183,36.095 15.414,36.326 15.697,36.609
  pour cut-out: 13.25,44.925 13.75,44.925 13.75,43.075 13.25,43.075
  pour cut-out: 18.25,43.075 18.246,42.456 18.505,42.454 18.431,42.341 18.067,42.368 18.067,43.076 18.246,43.076
  pour cut-out: 24.813,40.075 25.35,40.08 24.905,39.703 24.813,39.743
  pour cut-out: 25.872,39.632 25.872,39.374 27.15,39.45 27.15,39.55
  pour cut-out: 30.75,40.575 31.25,40.575 31.25,42.425 30.75,42.425
  pour cut-out: 31.25,37.775 30.75,37.775 30.75,39.625 31.25,39.625
  pour cut-out: 32,35.075 32.5,35.075 32.5,36.925 32,36.925
  pour cut-out: 26.521,21.696 26.575,21.25 28.425,21.25 28.479,21.696
  pour cut-out: 29.021,21.696 29.075,21.25 30.925,21.25 30.979,21.696
  pour cut-out: 35.25,12.425 35.75,12.425 35.75,10.575 35.25,10.575
  pour cut-out: 30.521,10.304 30.529,11.059 30.653,11.059 30.575,10.75 32.425,10.75 32.425,11.117 32.5,11.126 32.482,10.298 32.478,10.031 30.515,10.04
  pour cut-out: 21.1,14.375 21.1,13.625 22.9,13.625 22.9,14.375
  pour cut-out: 17.6,14.375 17.6,13.625 19.4,13.625 19.4,14.375
  pour cut-out: 28.521,34.804 28.533,34.804 28.533,35.635 28.657,35.635 28.734,35.311 30.5,35.331 30.474,34.534 28.528,34.534 28.528,34.806
  pour cut-out: 23.591,29.244 23.591,29.266 25.157,29.266 25.157,31.606 23.433,31.606 23.433,29.352 23.453,29.352
  pour cut-out: 18.441,40.54 18.441,40.52 18.377,40.456 18.408,40.425 18.408,40.075 18.937,40.075 18.937,40.668 18.441,40.668 18.441,40.456 18.377,40.456
  pour cut-out: 17,42.4 17.317,42.4 17.317,42.855 17.053,43.119 17.003,43.119
  pour cut-out: 17,40.6 17.009,40.592 17.009,39.479 17.191,39.479 17.235,39.523 17.235,39.975 17.555,39.975 17.671,40.091 17.671,40.255 17.331,40.595 17.331,40.699
  pour cut-out: 25.968,15.282 25.881,15.196 25.881,14.354 25.889,14.361 26.201,14.361 26.201,15.314 26.183,15.332

## Silkscreen, mask and mechanical layers (free items; w line width, h text height)
Top Overlay:
  lines w0.2: 22.247,1.27 22.247,5.842 37.5,5.842 37.5,1.27 22.247,1.27
  lines w0.3: 35.3,25.4 37.1,25.4 37.1,43.7 35.3,43.7 ; 38,6.6 39.7,6.6 39.7,23.4 38.05,23.4
  text "MPPT" at 38.4,36.9 h1
  text "Harvester" at 38.5,34.1 h1
  text "TP" at 44,29.5 h1
  text "TVS" at 17,28.1 h1
  text "-" at 46.854,20.192 h1.52
  text "+" at 46.854,12.7 h1.52
  text "Charger" at 40.7,10.133 h1
  text "-NTC-" at 27.45,2.95 h1
  text "V0.1 JAN'24" at 8.9,0.9 h1
Bottom Overlay:
  text "Solar Charger" at 20.746,12.862 h1.52